# Altium PCB PCB1.PcbDoc (part 2 of 2)
Units mm, origin at the board's own origin, x right, y up, seen from the top; angles counter-clockwise.
Board outline 100 x 100 mm, 4 copper layers (Top Layer, GND, POWER, Bottom Layer), stack 1.439 mm thick; 27 components, 14 nets, 65 pads, 66 vias.
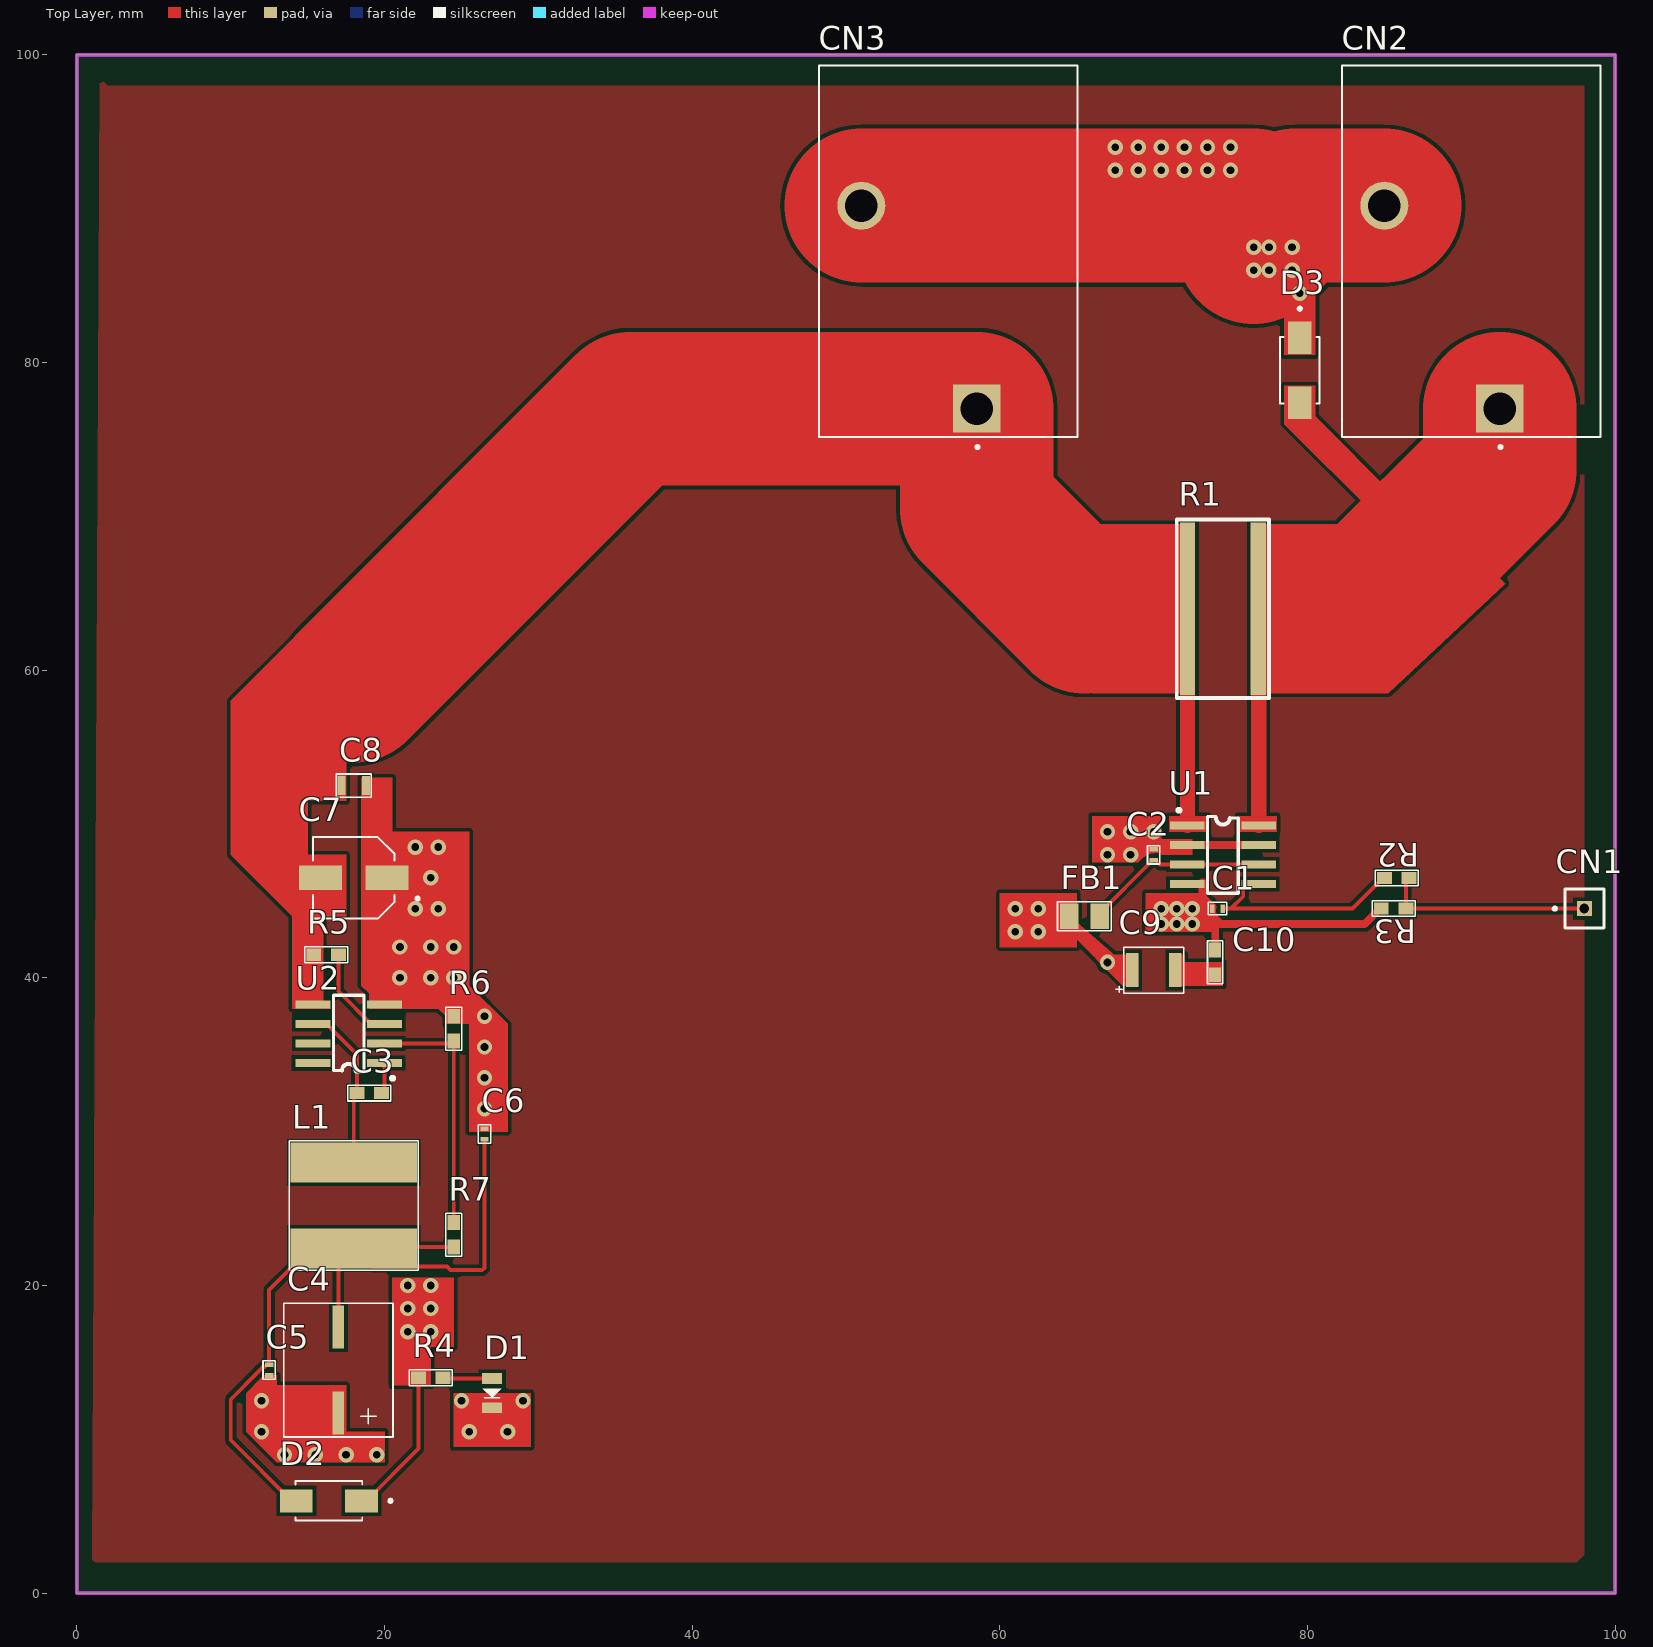
[diagram p0: Top Layer view]

## Part data (continued)
U1: "IC CURRENT SENSE 1 CIRCUIT 8SOIC", Manufacturer="Texas Instruments", Supplier Part Number=595-INA240A2DR, Category="Amplifiers - Op Amps, Buffer, Instrumentation", ComponentLink1Description=https://www.ti.com:443/lit/ds/symlink/ina240.pdf?src-supplier=IHS+Markit, ComponentLink1URL=https://www.ti.com:443/lit/ds/symlink/ina240.pdf?src-supplier=IHS+Markit, ComponentLink2Description=http://www.ti.com/lit/ds/symlink/ina240.pdf?src-supplier=Digikey, ComponentLink2URL=http://www.ti.com/lit/ds/symlink/ina240.pdf?src-supplier=Digikey, Designed by="ismet Akalın", JESD-609 Code=e4, Manufacturer Part Number=INA240A2DR, Moisture Sensitivity Level=2, Pricing="1=2,53, 10=1,89, 50=1,72, 100=1,55, 1000=1,37, 10000=1,31 (USD)", Reach SVHC Compliant=Yes, RoHS=Yes, RoHS Compliant=Yes, Stock=5129, Supplier=Mouser, Terminal Finish=Nickel, Throw Configuration="ANALOG CIRCUIT"
U2: "IC REG BUCK ADJ 600MA 8SOPWR", Case/Package=HLSOP, Frequency=1MHz, Manufacturer="TI National Semiconductor", Max Operating Temperature=125°C, Max Output current=1.3A, Max Supply Voltage=100V, Min Operating Temperature=-40°C, Min Input Voltage=7.5V, Nominal Supply Voltage=48V, Package Body Material=Plastic, Package Equivalence Code=SOP8,.25, Package Shape=Rectangular, Package Style="SMALL OUTLINE, HEAT SINK/SLUG, LOW PROFILEMeter", Peak Reflow Temperature (Cel)=260°C, Supplier Part Number=926-LM5017MR/NOPB, Temperature Grade=AUTOMOTIVE, Category="Voltage Regulators - Switching", Channels=1, ComponentLink1Description=https://www.ti.com:443/lit/ds/symlink/lm5017.pdf?src-supplier=IHS+Markit, ComponentLink1URL=https://www.ti.com:443/lit/ds/symlink/lm5017.pdf?src-supplier=IHS+Markit, ComponentLink2Description=https://datasheet.ciiva.com/6603/lm5017-6603724.pdf?src-supplier=Digikey, ComponentLink2URL=https://datasheet.ciiva.com/6603/lm5017-6603724.pdf?src-supplier=Digikey, Control Mode=VOLTAGE-MODE, Designed by="ismet Akalın", Height - Seated (Max)=1.68mm, JESD-30 Code=R-PDSO-G8, JESD-609 Code=e3, Length=4.9mm, Manufacturer Part Number=LM5017MR/NOPB, Moisture Sensitivity Level=3, Pins=8, Pricing="1=3,15, 10=2,39, 50=2,39, 100=1,96, 1000=1,96, 10000=1,96 (USD)", Qualification Status="Not Qualified", Reach SVHC Compliant=Yes, RoHS=Yes, RoHS Compliant=Yes, Stock=3103, Supplier=Mouser, Surface Mount=Yes, Switcher Configuration=BUCK, Terminal Finish=Tin, Terminal Form="Gull Wing", Terminal Pitch=1.27mm, Terminal Position=DUAL, Throw Configuration="SWITCHING REGULATOR", Width=3.9mm

## Via types
v1: diameter 1, hole 0.5, Top Layer to GND, 55 vias
v2: diameter 1, hole 0.5, Top Layer to POWER, 11 vias

## Nets (pads, with @x,y where several pads share a name; then routed paths per layer and width w, separated by ;. In a path a pad name is that pad's centre, name@x,y a point inside that pad or via, vN(x,y) a via of type N, cw(c..) or ccw(c..) an arc to the next point about the centre after c; other vN are vias at no path point)
36VDC: C7.2 C8.1 CN3.1 R1.0 R5.2 U1.1 U2.5 | length 78.5
  Top Layer w0.254: U1.1 U1.1@72.2,49.93
  Top Layer w1: U1.1@72.2,49.93 R1.0
  Top Layer w10: 18,59 36,77 CN3.1 58.5,70.5 65.5,63.5
Data_Out: CN1.1 R2.2 R3.2 | length 13.7
  Top Layer w0.254: R2.2 86.4,46.3 R3.2 CN1.1
GND: C1.1 C2.2 C4.1 C5.2 C6.2 C7.1 C8.2 C10.2 CN2.2 CN3.2 D1.1 D3.1 R3.1 R6.2 U1.2 U1.4 U1.7 U2.4 | length 59.4
  Top Layer w0.5: 69.281,48.069 69.516,48.304 69.741,48.304 69.762,48.325 69.975,48.325 C2.2 70.761,48.35 71.015,48.35 71.3,48.635 U1.7 ; U1.4@73.05,46.095 U1.4@73.173,45.972 ; U1.4@73.173,46.218 U1.4@73.173,45.972 ; C10.2 74,43.862 73.846,44.016 ; R3.1 84.711,44.5 83.711,43.5 74.362,43.5 73.846,44.016 ; U1.4@73.173,45.972 73.173,45.252 73.823,44.602 73.8,44.579 73.8,44.213 73.846,44.167 73.846,44.016
  Top Layer w10: CN3.2 76.5,90.2 ; v1(76.5,87.5) 79.2,90.2 CN2.2
  other v1: 13.5,9 15.5,9 17.5,9 19.5,9 12,10.5 25.5,10.5 28,10.5 12,12.5 25,12.5 29,12.5 26.5,31.5 26.5,33.5 26.5,35.5 26.5,37.5 21,40 23,40 24.5,40 21,42 23,42 24.5,42 70.5,43.5 71.5,43.5 72.5,43.5 22,44.5 23.5,44.5 70.5,44.5 71.5,44.5 72.5,44.5 23,46.5 67,48 68.5,48 22,48.5 23.5,48.5 67,49.5 68.5,49.5 70,49.5 79.5,84.5 76.5,86 77.5,86 79,86 77.5,87.5 79,87.5 67.5,92.5 69,92.5 70.5,92.5 72,92.5 73.5,92.5 75,92.5 67.5,94 69,94 70.5,94 72,94 73.5,94 75,94
"Motor (+)": CN2.1 D3.2 R1.1 U1.8 | length 29.4
  Top Layer w0.254: R1.1 R1.1@76.825,63.975
  Top Layer w1: U1.8 R1.1@76.825,63.975
  Top Layer w10: 84.5,65 92.5,73 CN2.1
NetC1_2: C1.2 R2.1 U1.5 | length 14.2
  Top Layer w0.254: C1.2 74.508,44.508 75.039,44.508 ; U1.5 75.95,46.095 75.827,45.972 75.827,45.296 75.039,44.508 ; R2.1 84.911,46.5 82.919,44.508 75.039,44.508
NetC2_1: C2.1 FB1.2 U1.3 U1.6 | length 12.1
  Top Layer w0.254: FB1.2 66.5,44.225 69.852,47.577 69.852,47.627 69.875,47.65 70.125,47.65 70.41,47.365 U1.3 U1.6
NetC3_1: C3.1 L1.1 U2.6 | length 10.8
  Top Layer w0.254: U2.6 16.225,37 18.2,35.025 C3.1 18,32.3 L1.1
NetC3_2: C3.2 U2.1 | length 2
  Top Layer w0.254: C3.2 20,32.7 U2.1
NetC4_2: C4.2 C5.1 C6.1 D2.2 L1.2 R7.2 | length 53
  Top Layer w0.254: D2.2 13.96,6 10,9.96 10,12.583 11.844,14.427 11.844,14.458 12.067,14.681 12.206,14.681 12.375,14.85 C5.1 12.5,19.7 15.2,22.4 L1.2 ; C4.2 17,21.4 L1.2 ; R7.2 18.1,22.5 L1.2 ; C6.1 26.5,21.149 26.351,21 24.276,21 24.049,21.227 19.173,21.227 L1.2
NetC9_1: C9.1 D2.1 FB1.1 R4.1 | length 9.8
  Top Layer w0.254: D2.1 18.81,6 22.2,9.39 R4.1 R4.1@22.289,14
  other v2: 21.5,17 23,17 21.5,18.5 23,18.5 21.5,20 23,20 67,41 61,43 62.5,43 61,44.5 62.5,44.5
NetC9_2: C9.2 C10.1
NetD1_2: D1.2 R4.2 | length 3.2
  Top Layer w0.254: R4.2 23.85,13.95 D1.2
NetR5_1: R5.1 U2.3 | length 6.3
  Top Layer w0.254: R5.1 17,39.125 19.125,37 U2.3
NetR6_1: R6.1 R7.1 U2.2 | length 16.4
  Top Layer w0.254: U2.2 24.33,35.73 R6.1 R7.1
pads on no net: U2.7 U2.8

## Polygon pours and split planes (outlines as drawn)
no net on Top Layer "NONET_L01_P000" (solid, pour order 0): 1.5,98.5 2,98 98,98 98,2.5 97.5,2 1,2
no net on POWER (split plane): 99.49,0.51 0.51,0.51 0.51,99.49 99.49,99.49
NetC9_1 on POWER (split plane): 65.248,43 65.256,42.935 65.282,42.874 65.322,42.822 65.374,42.782 65.435,42.756 65.5,42.748 68.748,42.748 68.748,39.752 65.752,39.752 65.752,41 65.744,41.065 65.718,41.126 65.678,41.178 65.626,41.218 65.565,41.244 65.5,41.252 59.5,41.252 59.493,41.251 59.485,41.252 59.46,41.247 59.435,41.244 59.428,41.241 59.421,41.239 59.398,41.228 59.374,41.218 59.368,41.214 59.362,41.211 24.362,18.211 24.342,18.194 24.322,18.178 24.317,18.172 24.312,18.168 24.297,18.146 24.282,18.126 24.279,18.119 24.275,18.113 24.266,18.089 24.256,18.065 24.255,18.058 24.253,18.051 24.251,18.025 24.248,18 24.248,15.752 20.252,15.752 20.252,21.248 24,21.248 24.003,21.248 24.007,21.248 24.036,21.253 24.065,21.256 24.068,21.258 24.072,21.258 24.099,21.27 24.126,21.282 24.129,21.284 24.132,21.285 59.132,42.785 59.155,42.804 59.178,42.822 59.18,42.824 59.183,42.827 59.2,42.851 59.218,42.874 59.22,42.877 59.222,42.88 59.232,42.907 59.244,42.935 59.244,42.938 59.245,42.941 59.248,42.971 59.252,43 59.252,45.748 65.248,45.748
GND on GND (split plane): 197 vertices, not listed, extent 10.267,7.259 80.248,95.248
no net on GND (split plane): 99.49,0.51 0.51,0.51 0.51,99.49 99.49,99.49

## Keep-outs
Keep-Out Layer:
  the board outline again, w0.254

## Other copper
Top Layer:
  region net GND: 69.5,43 74,43 73.823,43.177 73.823,44.602 72.925,45.5 69.5,45.5
  region net GND: 70.5,49 72.5,49 72.5,48 70.5,48
  region net GND: 66,50.5 66,47.5 69,47.5 69.85,48.35 70.5,48.35 70.5,50.5
  region net GND: 13,14.15 12.15,14.15 12,14 12.5,13.5 13,13.5
  region net GND: 20,8.5 13,8.5 11,10.5 11,13 12,14 12.5,13.5 17.5,13.5 17.5,10.5 20,10.5
  region net GND: 24.5,13 29.5,13 29.5,9.5 24.5,9.5
  region net GND: 28,37 28,30 25.5,30 25.5,37
  region net GND: 18.5,53 18.5,39.5 19,39 19,38 23.5,38 24,37.5 24,37 28,37 25.5,39.5 25.5,49.5 20.5,49.5 20.5,53
  region net "Motor (+)": 75.5,50.5 75.5,49.5 78,49.5 78,50.5
  region net 36VDC: 71,50.5 73.5,50.5 73.5,49.5 71,49.5
  region net NetC9_1: 60,45.5 60,42 65,42 65,45.5
  region net NetC9_1: 20.5,20.5 20.5,13.5 23,13.5 23,16 24.5,16 24.5,20.5
  region net NetC9_2: 71,41.5 71,39.5 72,39.5 72,41.5
  region net NetC9_2: 74.5,39.5 74.5,41 71,41 71,41.5 72,41.5 72,39.5
  region net NetC9_1: 69,39.5 69,41.5 67.5,41.5 67,41 67,40.5 68,39.5
  region net NetC9_1: 64,45 65,45 65,43.5 64.75,43.75 64,43.75
  region net NetC9_1: 64,44.5 64,43 64.5,43 68,39.5 69,39.5 69,41.5 68,41.5 68,41
  region net "Motor (+)": 78.5,78.5 78.5,76 84.5,70 85.75,71.25 80.5,76.5 80.5,78.5
  region net GND: 78.5,80.5 80.5,80.5 80.5,87.5 78.5,87.5
  region net 36VDC: 17.5,48 15,48 15,44 17.5,44 17.5,45.5 17.5,44 17.5,45.5
  region net 36VDC: 14,44 14,38 16.5,38 16,38.5 16,44
  region net 36VDC: 10,49.5 10,48 14,44 14,45.5
  region net 36VDC: 15,44 14,44 14,45.5 10,49.5 10,52 15,52
  region net 36VDC: 17.5,51.5 17.5,58.5 14,62 10,58 10,51.5
  region net 36VDC: 72.5,69.5 72.5,58.5 66,58.5 60,64.5 65,69.5
  region net "Motor (+)": 76.5,69.5 82,69.5 85.5,73 92.871,65.629 85.267,58.5 76.5,58.5
GND (plane layer: these items are gaps in the copper):
  rectangle: 73,45.5 78.5,51
  rectangle: 71.5,58 78,70
  lines w0.5: 10,10 10.5,13.5 13,15 24,16 23.5,38.5 19.5,38.5 19.5,44.5 20,50.5 24.5,50.5 66,74.5 66,95.5 80.5,95.5 80.5,82.5 73.5,82.5 73.5,74.5 28.5,50.5 66,51 72,51 72,47 72,46.625 72,46 72,45 73.5,45 73.5,43 73.5,42 67.5,42 67.5,47 66,47 28,45.5 30.5,12 29,9 22,9 20,7 12.5,7.5 10,10
POWER (plane layer: these items are gaps in the copper):
  rectangle: 70.5,45 78.5,51
  rectangle: 71,58 78,70
  lines w0.5: 20,15.5 24.5,15.5 24.5,18 59.5,41 65.5,41 65.5,39.5 69,39.5 69,43 65.5,43 65.5,46 59,46 59,43 24,21.5 20,21.5 20,15.5